# Altium PCB PCB1.PcbDoc
Units mil, origin at the board's own origin, x right, y up, seen from the top; angles counter-clockwise.
Board outline 3990 x 2370 mil, 2 copper layers (Top Layer, Bottom Layer); 9 components, 7 nets, 25 pads, 0 vias.
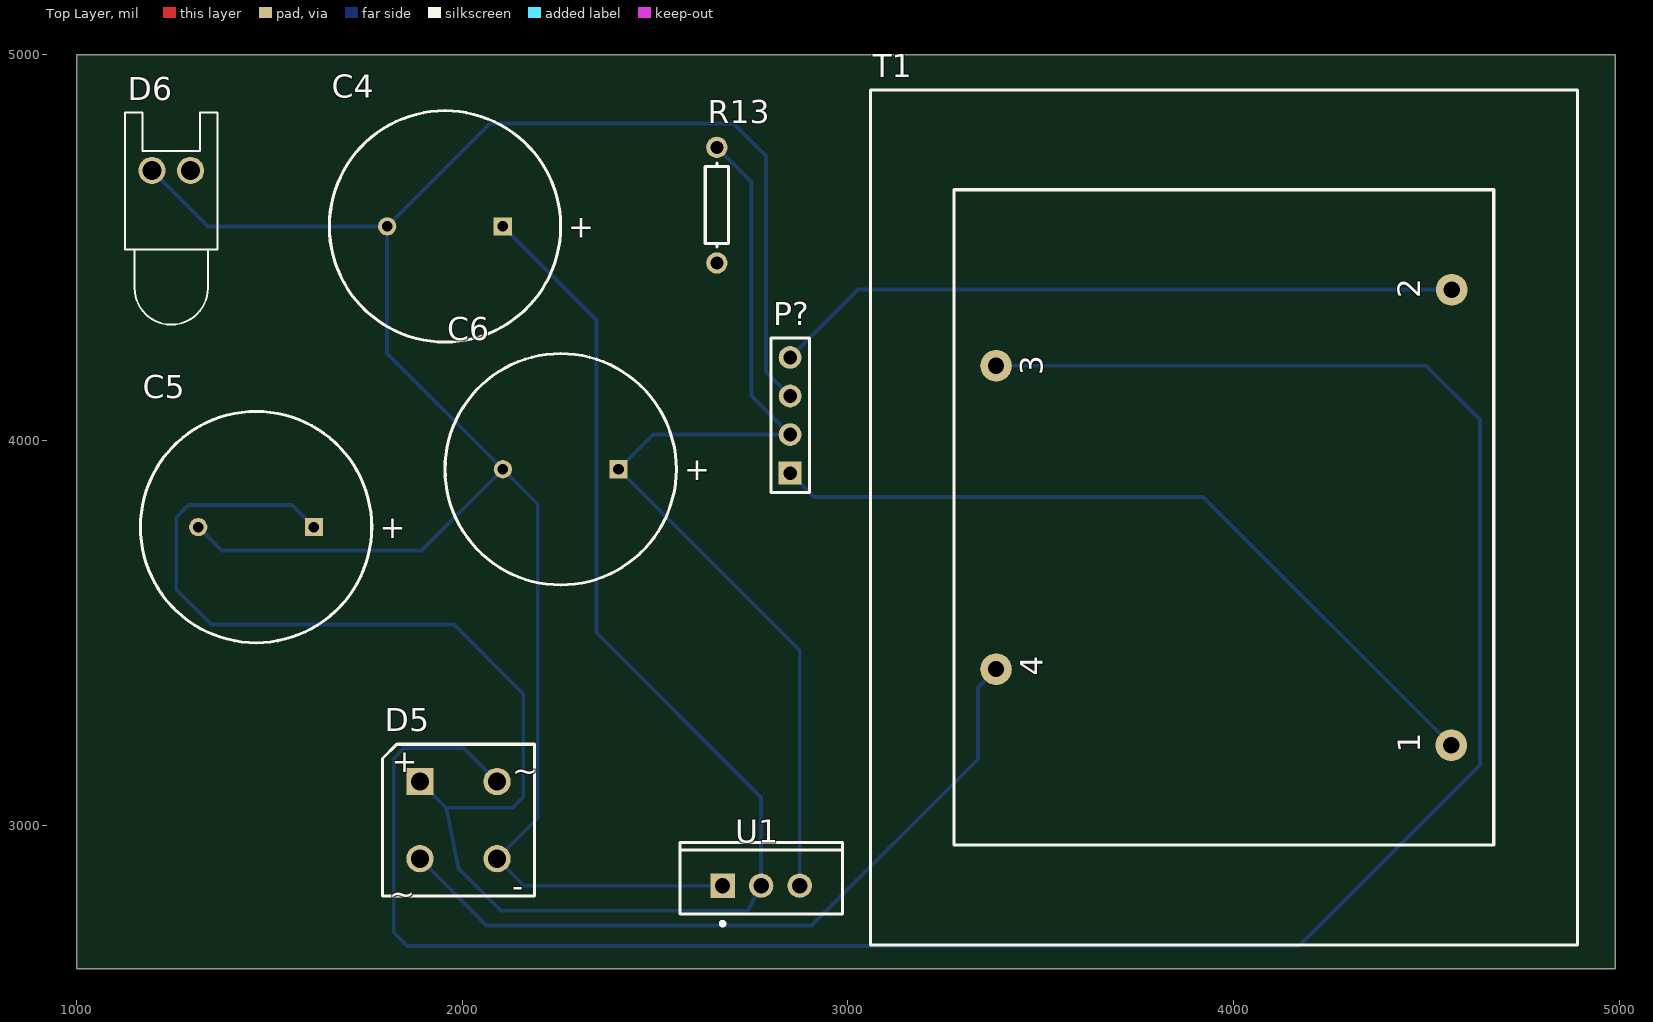
[diagram p0: Top Layer view]
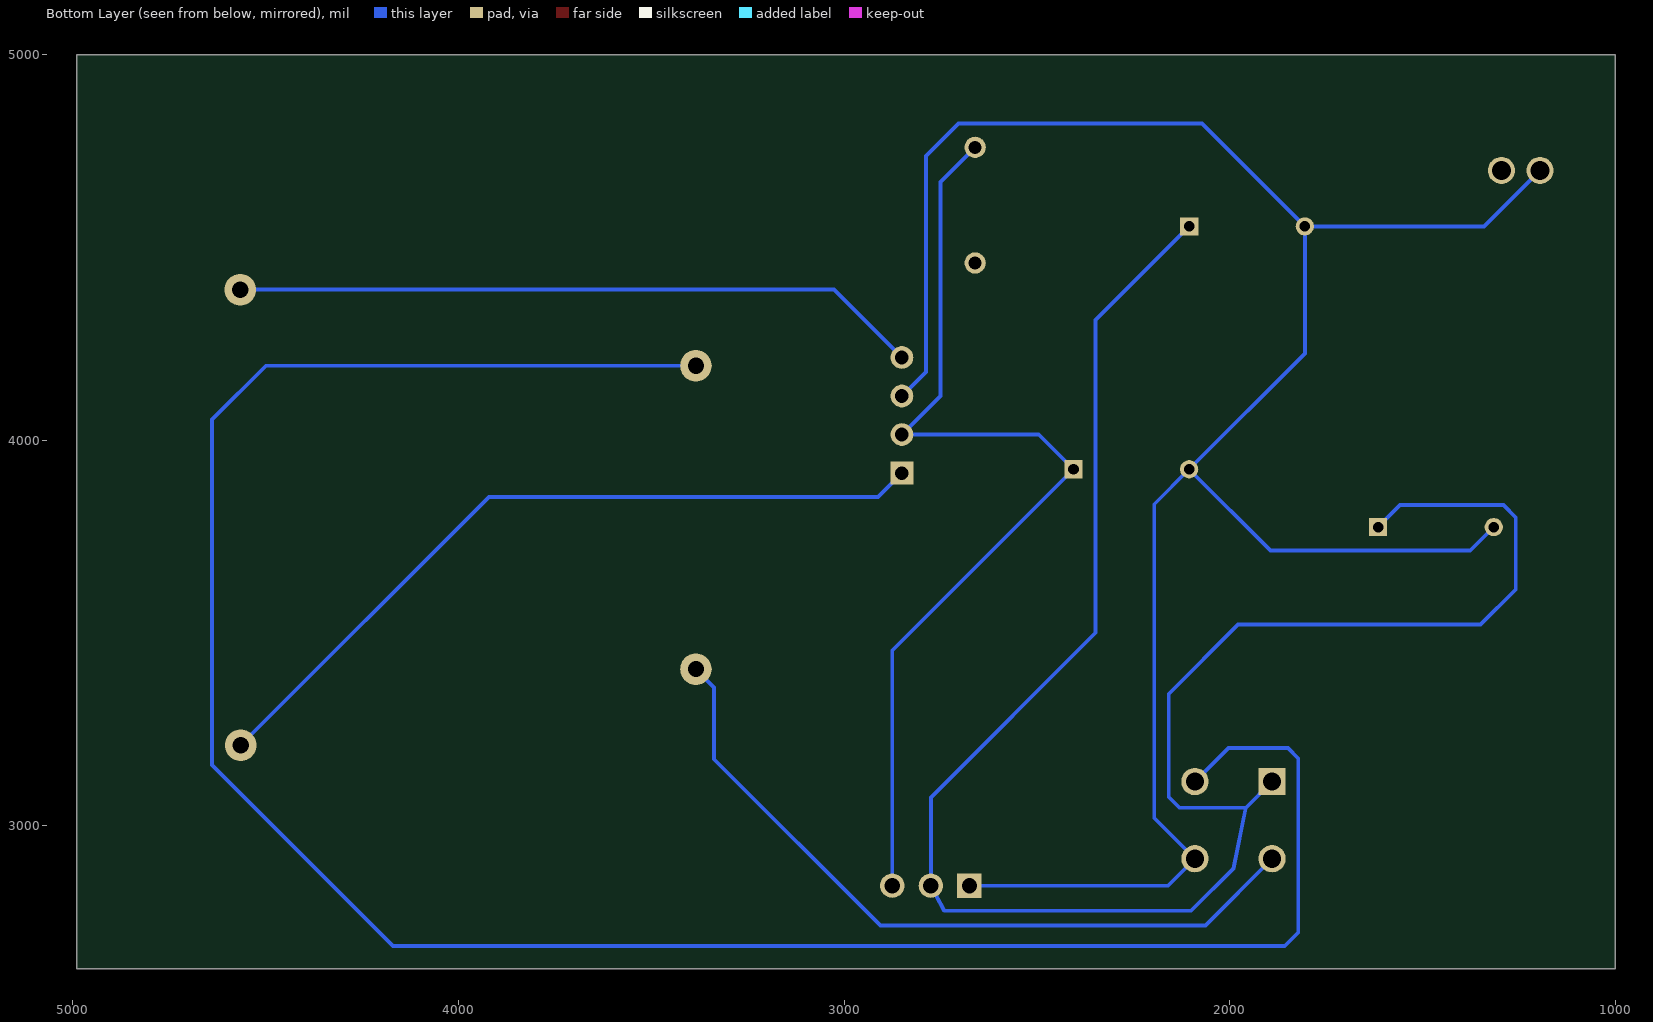
[diagram p1: Bottom Layer view, seen from below]

## Layer stack, top to bottom
Top Solder: solder mask 0.4, Solder Resist, Dk 3.5
Top Layer: signal copper 1.4
Dielectric 1: dielectric 12.6, FR-4, Dk 4.8
Bottom Layer: signal copper 1.4
Bottom Solder: solder mask 0.4, Solder Resist, Dk 3.5

## Board outline
1000,2630 4990,2630 4990,5000 1000,5000

## Design rules (kind name [scope] priority, off if disabled: settings)
Clearance [All] p1: gap=27.56 ignorepadtopadclearanceinfootprint=FALSE
PolygonConnect [All] p1: connectstyle=Direct reliefconductorwidth=10 reliefentries=4 polygonreliefangle="90 Angle" airgapwidth=10
RoomDefinition Sheet1 [InComponentClass('Sheet1')] p1: confinementstyle=ConfineIn formatcopy=TRUE lockcomponents=FALSE outline 1005,2610 4960,2610 4960,4992.72 1005,4992.72
RoutingLayers [All] p1: top layer_v5=FALSE bottom layer_v5=TRUE
RoutingVias [All] p1: holewidth=28 width=50 viastyle="Through Hole" minholewidth=28 minwidth=50 maxholewidth=28 maxwidth=50
SolderMaskExpansion [All] p1: expansion=4 istentingtop=FALSE
Width [All] p1: maxlimit=10 minlimit=10 preferedwidth=10
29 further rules are at their usual default settings.

## Components (designator, comment, footprint, x,y, rotation, side; value= is the part's Value field where it differs from the comment)
C4 "Cap Pol1" RB7.6-15 1955,4555 r0 top value=0.1uF
C5 "Cap Pol1" RB7.6-15 1465,3775 r0 top value=470uF
C6 "Cap Pol1" RB7.6-15 2255,3925 r0 top value=0.1uF
D5 "Bridge1" D-38 1990,3015 r0 top
D6 "LED0" LED-0 1245,4700 r0 top
P? "Header 4" HDR1X4 2850,3915 r90 top
R13 "Res1" AXIAL-0.3 2660,4610 r90 top value=4.7k
T1 "Trans Cupl" TRF_4 3975,3800 r90 top
U1 "LM7905CT/NOPB" NDE0003A 2775,2845 r0 top

## Footprints (in the part's own frame and the unit in brackets; to place one, negate y for a bottom-side part, rotate by r counter-clockwise, add the part's x,y. Pads: shape width x height; smd on the part's side, far side on the other; paste and mask are expansions set on the pad)
AXIAL-0.3 [mm] "Axial Device, Thru-Hole; 2 Leads; 0.3 in Pin Spacing"
  round 1.4 hole 0.85: 1(-3.81,0) 2(3.81,0)
  silkscreen extent -2.77,-0.76 2.77,0.76
D-38 [mm] "Bridge Rectifier; 4 Terminals; Body 9.4 x 9.4 mm (typ); Pitch 5.08 mm"
  rect 1.8x1.8 hole 1.2: 1(-2.54,2.54)
  round 1.8 hole 1.2: 2(-2.54,-2.54) 3(2.54,-2.54) 4(2.54,2.54)
  silkscreen extent -5,-5 5,5, body extent -5,-5 5,5, height 9.91
HDR1X4 [mm] "Connector; Header; 4 Position"
  rect 1.5x1.5 hole 0.9: 1(0,0)
  round 1.5 hole 0.9: 2(2.54,0) 3(5.08,0) 4(7.62,0)
  silkscreen extent -1.27,-1.27 8.89,1.27
LED-0 [mil] "LED; 2 Leads"
  round 70 hole 50: 1(50,0) 2(-50,0)
  silkscreen extent -120,-400 120,150
NDE0003A [mm] "FM, 3-Leads, Body 10.7x4.7mm, Pitch 2.54mm"
  rect 1.6x1.6 hole 1: 1(-2.54,0)
  round 1.6 hole 1: 2(0,0) 3(2.54,0)
  silkscreen extent -5.35,-2.62 5.35,2.85, body extent -5.4,-1.9 5.4,2.9, height 19.4
RB7.6-15 [mm] "Polarized Capacitor (Radial); 2 Leads"
  rect 1.2x1.2 hole 0.7: 1(3.81,0)
  round 1.2 hole 0.7: 2(-3.81,0)
  silkscreen extent -7.62,-7.62 7.62,7.62
TRF_4 [mil] "Transformer; 4 Leads"
  round 82 hole 42: 1(-590.83,-590) 2(590.83,-590.83) 3(393.33,590.83) 4(-393.33,590.83)
  silkscreen extent -1108,-917 1108,917

## Part data
C4 C5 C6: "Polarized Capacitor (Radial)", LatestRevisionDate=17-Jul-2002, LatestRevisionNote="Re-released for DXP Platform.", PackageDescription="Polarized Capacitor (Radial); 2 Leads", PackageReference=RB7.6-15, Published=8-Jun-2000, Publisher="Altium Limited"
D5: "Full Wave Diode Bridge", DatasheetVersion=E2732B, LatestRevisionDate=29-May-2009, LatestRevisionNote="Sch pins A & K swapped.", PackageDescription="Bridge Rectifier; 4 Terminals; Body 9.4 x 9.4 mm (typ); Pitch 5.08 mm", PackageReference=D-38, Published=8-Jun-2000, Publisher="Altium Limited"
D6: "Typical INFRARED GaAs LED", LatestRevisionDate=08-Jul-2005, LatestRevisionNote="Mech Layer 1 removed.", PackageDescription="LED; 2 Leads", PackageReference=LED-0, Published=8-Jun-2000, Publisher="Altium Limited"
P?: "Header, 4-Pin", LatestRevisionDate=17-Jul-2002, LatestRevisionNote="Re-released for DXP Platform.", Publisher="Altium Limited"
R13: "Resistor", LatestRevisionDate=17-Jul-2002, LatestRevisionNote="Re-released for DXP Platform.", PackageDescription="Axial Device, Thru-Hole; 2 Leads; 0.3 in Pin Spacing", PackageReference=AXIAL-0.3, Published=8-Jun-2000, Publisher="Altium Limited"
T1: "Transformer (Coupled Inductor Model)", LatestRevisionDate=17-Jul-2002, LatestRevisionNote="Re-released for DXP Platform.", PackageDescription="Transformer; 4 Leads", PackageReference=TRF_4, Published=8-Jun-2000, Publisher="Altium Limited"
U1: library part CMP-0062-02481-3, "3-Terminal Negative Regulator, 3-pin TO-220, Pb-Free", Manufacturer="Texas Instruments", PackageTopMarking=NSUZXYTTE#*LM7905CT, PowerWise=N, ComponentLink1Description="Datasheet URL", ComponentLink1URL=http://www.ti.com/general/docs/lit/getliterature.tsp?genericPartNumber=LM7905&fileType=pdf, CompType="LDO IC", PackageDescription="TO-220, Molded, 3 Lead, Straight", PackageReference=NDE0003A, PinCount=3, RoHS=Y

## Nets (pads, with @x,y where several pads share a name; then routed paths per layer and width w, separated by ;. In a path a pad name is that pad's centre, name@x,y a point inside that pad or via, vN(x,y) a via of type N, cw(c..) or ccw(c..) an arc to the next point about the centre after c; other vN are vias at no path point)
"12V Vout": C6.1 P?.2 R13.2 U1.3 | length 2580.7
  Bottom Layer w10: R13.2 2750.35,4669.65 2750.35,4114.65 P?.2 2495,4015 C6.1 2875,3455 U1.3
"230V Vin": P?.1 T1.1 | length 2007.4
  Bottom Layer w10: P?.1 2912,3853 3921.17,3853 T1.1
"GND AC": P?.4 T1.2 | length 1788.7
  Bottom Layer w10: P?.4 3025.83,4390.83 T1.2
"GND DC": C4.2 C5.2 C6.2 D5.3 D6.2 P?.3 U1.1 | length 5808.7
  Bottom Layer w10: D6.2 1340,4555 C4.2 ; C5.2 1376,3714 1894,3714 C6.2 ; U1.1 2160,2845 D5.3 2195.55,3020.55 2195.55,3834.45 C6.2 ; P?.3 2787.91,4177.09 2787.91,4737.09 2703,4822 2072,4822 C4.2 ; C4.2 1805,4225 C6.2
NetC4_1: C4.1 C5.1 D5.1 U1.2 | length 5185
  Bottom Layer w10: C5.1 1558,3832 1290,3832 1258,3800 1258,3613 1349,3522 1978,3522 2157.99,3342.01 2157.99,3075 2129.99,3047 1958,3047 ; D5.1 1958,3047 ; C4.1 2348,4312 2348,3501 2775,3074 U1.2 2740,2780 2100,2780 1990,2890 1958,3047
NetD5_2: D5.2 T1.4 | length 1950.4
  Bottom Layer w10: D5.2 2063,2742 2906,2742 3337,3173 3337,3359.5 T1.4
NetD5_4: D5.4 T1.3 | length 6000.7
  Bottom Layer w10: D5.4 2003,3202 1849,3202 1822,3175 1822,2724 1857,2689 4170,2689 4639,3158 4639,4054.33 4500,4193.33 T1.3
pads on no net: D6.1 R13.1

## Text inside footprints (layer, text, board x,y; h text height)
C4: Top Overlay "+" at 2275.15,4525.99 h59.06
C5: Top Overlay "+" at 1785.15,3745.99 h59.06
C6: Top Overlay "+" at 2575.15,3895.99 h59.06
D5: Top Overlay "+" at 1816.38,3139.57 h59.06; Top Overlay "-" at 2130,2815 h59.05; Top Overlay "~" at 1810,2795 h59.05; Top Overlay "~" at 2130,3115 h59.05
T1: Top Overlay "1" at 4485,3189.17 h59.06 r90; Top Overlay "2" at 4485,4369.17 h59.06 r90; Top Overlay "4" at 3505,3389.17 h59.06 r90; Top Overlay "3" at 3505,4169.17 h59.06 r90